# Altium PCB ti84_usbc.PcbDoc
Units mm, origin at the board's own origin, x right, y up, seen from the top; angles counter-clockwise.
Board outline 10.2 x 10.86 mm, 2 copper layers (F.Cu, B.Cu); 6 components, 17 nets, 46 pads, 7 vias.
Unrouted connection lines stored in the file: 1.
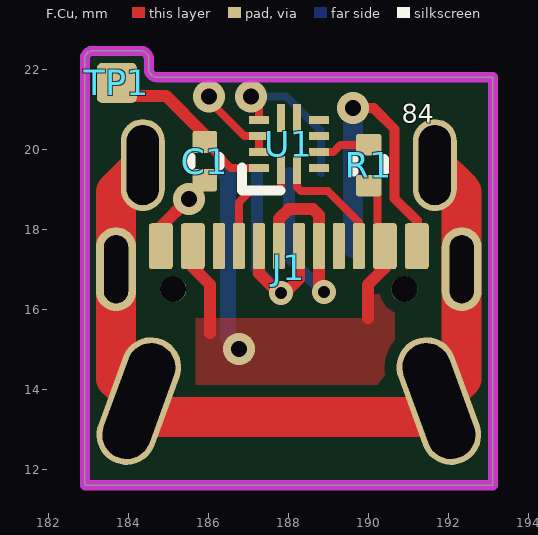
[diagram p0: F.Cu view]
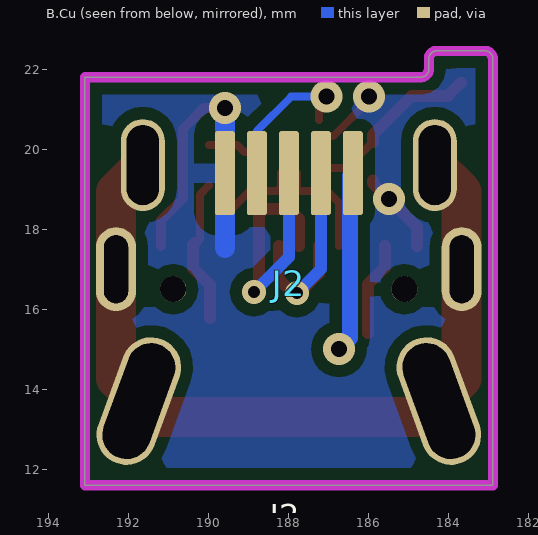
[diagram p1: B.Cu view, seen from below]

## Layer stack, top to bottom
F.Mask: solder mask 0.0102, Solder Resist, Dk 3.5
F.Cu: signal copper 0.0356
Dielectric 1: dielectric 0.32, FR-4, Dk 4.8
B.Cu: signal copper 0.0356
B.Mask: solder mask 0.0102, Solder Resist, Dk 3.5

## Board outline
183.1,22.456 ccw(c183.1,22.256) 182.9,22.256 182.9,11.598 193.1,11.598 193.1,21.798 184.7,21.798 cw(c184.7,21.998) 184.5,21.998 184.5,22.256 ccw(c184.3,22.256) 184.3,22.456 183.1,22.456

## Design rules (kind name [scope] priority, off if disabled: settings)
Clearance "Clearence 0.3_Polygon" [InNamedPolygon('F.Cu-/VBUS') OR InNamedPolygon('B.Cu-GND')] p1: gap=0.3 ignorepadtopadclearanceinfootprint=FALSE
MinimumSolderMaskSliver [All] p1: minsoldermaskwidth=0
PolygonConnect Polygon_B.Cu-GND_ConnectDirect [IsNamedPolygon('B.Cu-GND') vs IsVia] p1: connectstyle=Direct reliefconductorwidth=0.254 reliefentries=4 polygonreliefangle="90 Angle" airgapwidth=0.254
PolygonConnect Polygon_B.Cu-GND_ConnectRelief45 [IsNamedPolygon('B.Cu-GND') vs (IsThruPin or IsSMTPin) and (PadShape_AllLayers = 'Round')] p2: connectstyle=Relief reliefconductorwidth=0.5 reliefentries=4 polygonreliefangle="45 Angle" airgapwidth=0.5
PolygonConnect Polygon_B.Cu-GND_ConnectRelief90 [IsNamedPolygon('B.Cu-GND') vs (IsThruPin or IsSMTPin) and (PadShape_AllLayers <> 'Round')] p3: connectstyle=Relief reliefconductorwidth=0.5 reliefentries=4 polygonreliefangle="90 Angle" airgapwidth=0.5
PolygonConnect Polygon_F.Cu-/VBUS_ConnectDirect [IsNamedPolygon('F.Cu-/VBUS') vs IsVia] p4: connectstyle=Direct reliefconductorwidth=0.254 reliefentries=4 polygonreliefangle="90 Angle" airgapwidth=0.254
PolygonConnect Polygon_F.Cu-/VBUS_ConnectRelief45 [IsNamedPolygon('F.Cu-/VBUS') vs (IsThruPin or IsSMTPin) and (PadShape_AllLayers = 'Round')] p5: connectstyle=Relief reliefconductorwidth=0.5 reliefentries=4 polygonreliefangle="45 Angle" airgapwidth=0.5
PolygonConnect Polygon_F.Cu-/VBUS_ConnectRelief90 [IsNamedPolygon('F.Cu-/VBUS') vs (IsThruPin or IsSMTPin) and (PadShape_AllLayers <> 'Round')] p6: connectstyle=Relief reliefconductorwidth=0.5 reliefentries=4 polygonreliefangle="90 Angle" airgapwidth=0.5
RoutingVias [All] p1: holewidth=0.711 width=1.27 viastyle="Through Hole" minholewidth=0.711 minwidth=1.27 maxholewidth=0.711 maxwidth=1.27
SilkToSilkClearance [All] p1: silktosilkclearance=0
SilkToSolderMaskClearance [IsPad] p1: minsilkscreentomaskgap=0 clearancetoexposedcopper=TRUE
SolderMaskExpansion [All] p1: expansion=0.102 istentingtop=FALSE
Width [All] p1: maxlimit=10 minlimit=0.254 preferedwidth=0.254 minimp=50.000000 maximp=50.000000 favimp=50.000000
27 further rules are at their usual default settings.

## Components (designator, comment, footprint, x,y, rotation, side; value= is the part's Value field where it differs from the comment)
C1 "0.1uF" C_0402_1005Metric 185.9,19.698 r90 top
J1 "USB_C_Receptacle_USB2.0" USB_C_Receptacle_GCT_USB4105-xx-A_16P_TopMnt_Horizontal 188,13.893 r0 top
J2 "USB_OTG" ti84_mini_usb 188.25,9.8 r0 bottom
R1 "900k" R_0402_1005Metric 190,19.598 r270 top
TP1 "BATT" TestPoint_Pad_1.0x1.0mm 183.7,21.656 r0 top
U1 "TUSB320" IC_TUSB320IRWBR 188,20.123 r90 top

## Footprints (in the part's own frame and the unit in brackets; to place one, negate y for a bottom-side part, rotate by r counter-clockwise, add the part's x,y. Pads: shape width x height; smd on the part's side, far side on the other; paste and mask are expansions set on the pad)
C_0402_1005Metric [mm]
  rrect25% 0.56x0.62 smd mask+0: 1(-0.48,0) 2(0.48,0)
  silkscreen extent -0.11,-0.36 0.11,0.36
IC_TUSB320IRWBR [mm]
  rrect5% 0.7x0.2 smd paste-0.7 mask-0.7: 1(-0.65,0.2) 2(-0.65,-0.2) 7(0.65,-0.2) 8(0.65,0.2)
  rrect13% 0.2x0.5 smd mask-0.5: 3(-0.6,-0.75) 4(-0.2,-0.75) 5(0.2,-0.75) 6(0.6,-0.75) 9(0.6,0.75) 10(0.2,0.75) 11(-0.2,0.75) 12(-0.6,0.75)
  silkscreen extent -1.16,0.21 -0.59,1.17
R_0402_1005Metric [mm]
  rrect25% 0.54x0.64 smd mask+0: 1(-0.51,0) 2(0.51,0)
  silkscreen extent -0.15,-0.38 0.15,0.38
TestPoint_Pad_1.0x1.0mm [mm]
  rrect25% 1x1 smd paste-1 mask+0: 1(0,0)
ti84_mini_usb [mm]
  rrect25% 0.5x2.1 smd mask+0: 1(-1.85,-9.6) 2(-1.05,-9.6) 3(-0.25,-9.6) 4(0.55,-9.6) 5(1.35,-9.6)
  rrect100% 1.5x3.3 hole 3 slot 1.2 at 20 deg rot 20 paste-2539.97 mask+0: 6(-4,-3.9)
  rrect100% 1.1x2.3 hole 2 slot 0.8 at 0 deg paste-2539.97 mask+0: 6(-3.9,-9.8) 6(3.4,-9.8)
  rrect100% 1.5x3.3 hole 3 slot 1.2 at 160 deg rot 160 paste-2539.97 mask+0: 6(3.5,-3.9)
USB_C_Receptacle_GCT_USB4105-xx-A_16P_TopMnt_Horizontal [mm]
  rrect25% 0.6x1.15 smd mask+0: A1(-3.2,3.68) A4(-2.4,3.68) A9(2.4,3.68) A12(3.2,3.68) B1(3.2,3.68) B4(2.4,3.68) B9(-2.4,3.68) B12(-3.2,3.68)
  rrect25% 0.3x1.15 smd mask+0: A5(-1.25,3.68) A6(-0.25,3.68) A7(0.25,3.68) A8(1.25,3.68) B5(1.75,3.68) B6(0.75,3.68) B7(-0.75,3.68) B8(-1.75,3.68)
  rrect100% 1x2.1 hole 1.7 slot 0.6 at 0 deg mask+0: S1(-4.32,3.105) S1(4.32,3.105)
  round 0.65 hole 0.65 paste-2539.97 mask+0: Un1(-2.89,2.605) Un2(2.89,2.605)

## Part data
C1: library part C_0402_1005Metric, "Capacitor SMD 0402 (1005 Metric), square (rectangular) end terminal, IPC_7351 nominal, (Body size source: IPC-SM-782 page 76, https://www.pcb-3d.com/wordpress/wp-content/uploads/ipc-sm-782a_amendment_1_and_2.pdf), generated with kicad-footprint-generator", Sheetfile=ti84_usbc.kicad_sch, ki_description="Unpolarized capacitor", ki_keywords="cap capacitor"
J1: library part USB_C_Receptacle_GCT_USB4105-xx-A_16P_TopMnt_Horizontal, "USB 2.0 Type C Receptacle, GCT, 16P, top mounted, horizontal, 5A: https://gct.co/files/drawings/usb4105.pdf", Sheetfile=ti84_usbc.kicad_sch, ki_description="USB 2.0-only Type-C Receptacle connector", ki_keywords="usb universal serial bus type-C USB2.0"
J2: library part ti84_mini_usb, Sheetfile=ti84_usbc.kicad_sch, ki_description="USB mini/micro connector", ki_keywords="connector USB"
R1: library part R_0402_1005Metric, "Resistor SMD 0402 (1005 Metric), square (rectangular) end terminal, IPC_7351 nominal, (Body size source: IPC-SM-782 page 72, https://www.pcb-3d.com/wordpress/wp-content/uploads/ipc-sm-782a_amendment_1_and_2.pdf), generated with kicad-footprint-generator", Sheetfile=ti84_usbc.kicad_sch, ki_description=Resistor, ki_keywords="R res resistor"
TP1: library part TestPoint_Pad_1.0x1.0mm, "SMD rectangular pad as test Point, square 1.0mm side length", Sheetfile=ti84_usbc.kicad_sch, ki_description="test point", ki_keywords="test point tp"
U1: library part IC_TUSB320IRWBR, Sheetfile=ti84_usbc.kicad_sch, ki_description="USB Type-C Configuration Channel Logic and Port Control, X2QFN-12", ki_keywords="USB PD CC"

## Via types
v1: diameter 0.8, hole 0.4, F.Cu to B.Cu, tented both sides, 5 vias
v2: diameter 0.6, hole 0.3, F.Cu to B.Cu, tented both sides, 2 vias

## Nets (pads, with @x,y where several pads share a name; then routed paths per layer and width w, separated by ;. In a path a pad name is that pad's centre, name@x,y a point inside that pad or via, vN(x,y) a via of type N, cw(c..) or ccw(c..) an arc to the next point about the centre after c; other vN are vias at no path point)
+BATT: C1.2 TP1.1 U1.12 | length 4.5
  F.Cu w0.2: C1.2 186.555,19.523 U1.12
  F.Cu w0.3: TP1.1 184.027,21.329 184.928,21.329 185.9,20.358 C1.2
CC1: J1.A5 U1.1 | length 2.7
  F.Cu w0.2: J1.A5 186.75,18.663 187.035,18.948 187.715,18.948 187.8,19.032 U1.1@187.8,19.397
CC2: J1.B5 U1.2 | length 2.9
  F.Cu w0.2: U1.2@188.2,19.397 188.2,19.049 188.301,18.948 188.982,18.948 189.75,18.18 J1.B5
D+: J1.A6 J1.B6 J2.3 | length 7.2
  F.Cu w0.3: J1.A6 187.75,18.251 187.997,18.498 188.61,18.498 188.75,18.358 J1.B6 188.75,16.548 v2(188.873,16.424)
  B.Cu w0.3: J2.3 188,17.297 v2(188.873,16.424)
D-: J1.A7 J1.B7 J2.2 | length 6.1
  F.Cu w0.3: J1.B7 187.25,16.894 187.747,16.398 v2(187.8,16.398) 187.9,16.398 188.25,16.748 J1.A7
  B.Cu w0.3: J2.2 187.2,16.998 v2(187.8,16.398)
GND: C1.1 J1.A1 J1.A12 J1.B1 J1.B12 J2.5 U1.10 U1.11 | length 12.2
  F.Cu w0.2: v1(185.998,21.32) 185.998,21.215 186.89,20.323 U1.10 U1.11
  F.Cu w0.25: v1(189.6,21.023) 190.125,21.023 190.645,20.503 190.645,18.768 191.2,18.213 J1.B1
  F.Cu w0.3: J1.B12 184.8,18.059 185.492,18.751 v1(185.502,18.751) 185.9,19.149 C1.1
  B.Cu w0.5: 189.6,17.523 J2.5 ; J2.5@189.6,19.334 v1(189.6,21.023)
ID: J2.4 U1.9 | length 3.8
  F.Cu w0.2: v1(187.054,21.309) 187.25,21.113 U1.9
  B.Cu w0.2: v1(187.054,21.309) 187.941,21.309 188.8,20.45 J2.4
Net-(U1-VBUS_DET): R1.1 U1.4 | length 1.3
  F.Cu w0.2: U1.4@188.825,19.923 189.11,19.923 189.295,20.108 R1.1
SHIELD: J1.S1 J2.6 | length 20.7
  F.Cu w1: J2.6@184.35,19.6 183.68,18.93 183.68,17.023 183.68,14.27 184.653,13.298 191.347,13.298 192.32,14.27 192.32,17.023 192.32,18.93 J2.6@191.65,19.6
unconnected-(J1-SBU1-PadA8): J1.A8
unconnected-(J1-SBU2-PadB8): J1.B8
unconnected-(U1-ADDR-Pad5): U1.5
unconnected-(U1-PORT-Pad3): U1.3
unconnected-(U1-SCL{slash}OUT2-Pad8): U1.8
unconnected-(U1-SDA{slash}OUT1-Pad7): U1.7
unconnected-(U1-{\I\N\T\}\{\s\l\a\s\h\}\O\U\T\3\-\P\a\d\6\)\: U1.6
VBUS: J1.A4 J1.A9 J1.B4 J1.B9 J2.1 R1.2 | length 10.6
  F.Cu w0.2: R1.2 190.22,18.868 190.22,17.753 J1.B4
  F.Cu w0.3: J1.B9 185.6,17.044 186.025,16.619 186.025,15.398 ; 189.975,15.773 189.975,16.608 190.4,17.033 J1.B4 ; J1.B4@190.35,17.648 J1.B4@190.4,17.598
  B.Cu w0.4: J2.1 186.475,19.325 186.475,15.273 v1(186.75,14.998)
pads on no net: J1.Un1 J1.Un2

## Polygon pours and split planes (outlines as drawn)
VBUS on F.Cu "F.Cu-/VBUS" (solid, remove dead copper, pour order 1): 190.65,18.498 190.025,18.498 190.025,15.773 185.675,15.773 185.675,14.098 190.65,14.098
GND on B.Cu "B.Cu-GND" (solid, remove dead copper, pour order 2): 193.1,21.798 193.1,11.598 182.9,11.598 182.9,22.448 184.55,22.448 184.55,21.798

## Keep-outs
Edge.Cuts:
  lines w0: 182.9,11.598 193.1,11.598 193.1,21.798 184.7,21.798 cw(c184.7,21.998) 184.5,21.998 184.5,22.256 ccw(c184.3,22.256) 184.3,22.456 183.1,22.456 ccw(c183.1,22.256) 182.9,22.256 182.9,11.598
  lines w0.254: 182.9,11.598 193.1,11.598 193.1,21.798 184.7,21.798 cw(c184.7,21.998) 184.5,21.998 184.5,22.256 ccw(c184.3,22.256) 184.3,22.456 183.1,22.456 ccw(c183.1,22.256) 182.9,22.256 182.9,11.598

## Silkscreen, mask and mechanical layers (free items; w line width, h text height)
F.SilkS:
  text "84" at 190.825,20.495 h0.8

## Text inside footprints (layer, text, board x,y; h text height)
J1: Dwgs.User "PCB Edge" at 187.442,10.601 h0.5